# EAGLE board Touch_V5 (EAGLE 6.1)
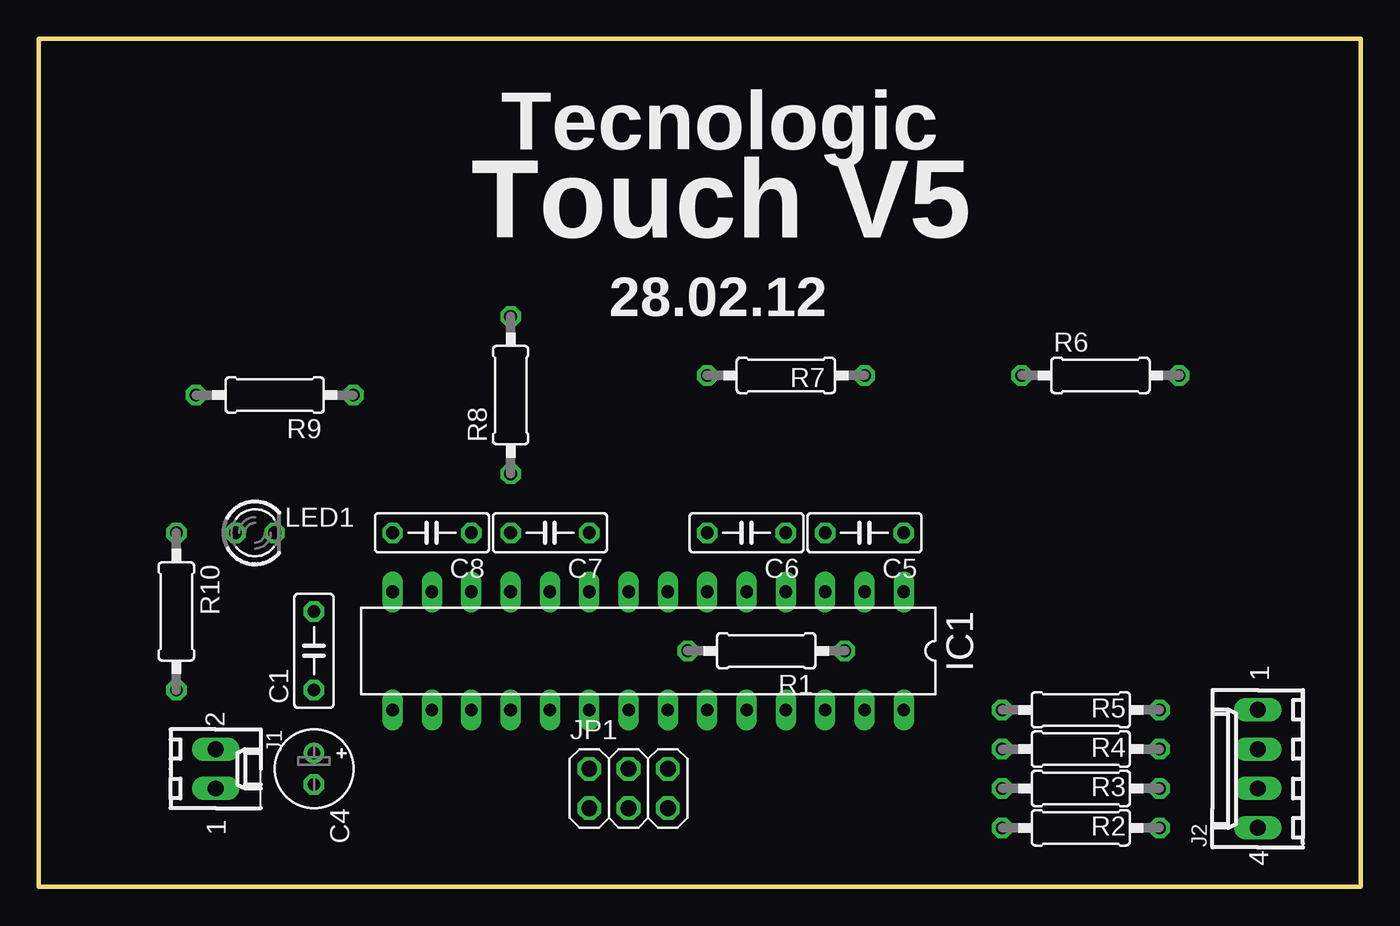
[diagram p0: board, top side]
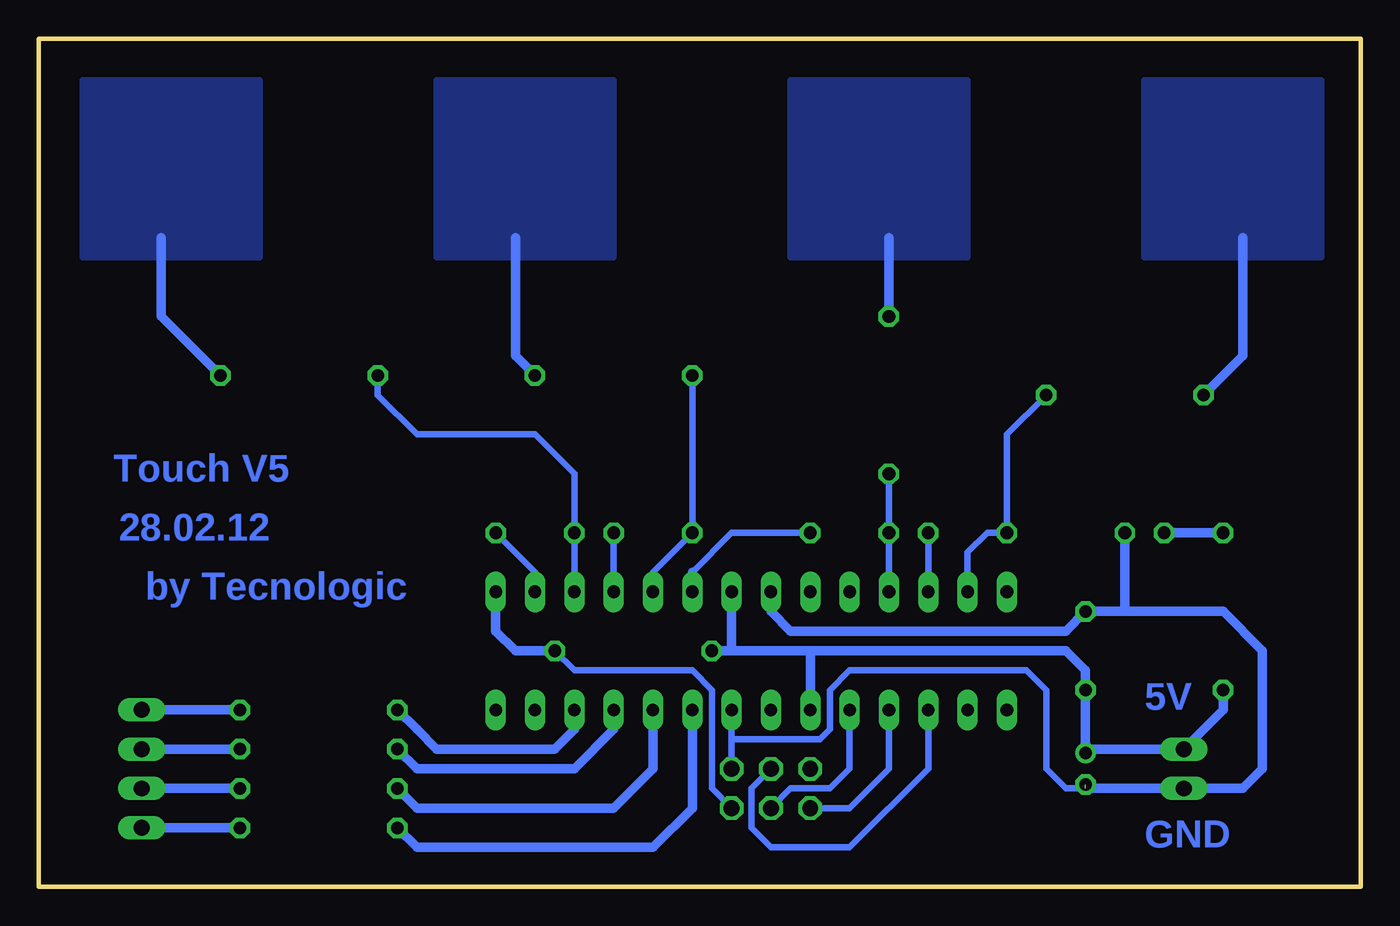
[diagram p1: board, bottom side, seen from below]

Size 85.39 x 54.76 mm. Coordinates in mm from the lower left corner, seen from the top.
Outline: 0,0 85.39,0 85.39,54.76 0,54.76 0,0
Copper layers (1*16): Top 0.035mm / dielectric 1.5mm / Bottom 0.035mm
Design rules: minimum track width 10mil, minimum drill 24mil, track to track 10mil, track to pad 10mil, pad to pad 10mil, via to via 10mil, smd to smd 8mil, copper to edge 40mil, drill to drill 8mil, minimum pad ring 10mil, minimum via ring 8mil, stop-mask expansion 4mil, vias tented up to drill 0mil, thermal gap 10mil

## Footprints (pad centres in the part's own frame; a part is rotated, then mirrored left to right if it is on the bottom)
C050-025X075 = drill 0.813 octagon: 1 -2.54,0; 2 2.54,0
E2-5 = drill 0.813 pad 1.27: + -1.016,0 | drill 0.813 pad 1.27 octagon: - 1.016,0
DIL28-3 = drill 0.813 long: 1 -16.51,-3.81; 2 -13.97,-3.81; 3 -11.43,-3.81; 4 -8.89,-3.81; 5 -6.35,-3.81; 6 -3.81,-3.81; 7 -1.27,-3.81; 8 1.27,-3.81; 9 3.81,-3.81; 10 6.35,-3.81; 11 8.89,-3.81; 12 11.43,-3.81; 13 13.97,-3.81; 14 16.51,-3.81; 15 16.51,3.81; 16 13.97,3.81; 17 11.43,3.81; 18 8.89,3.81; 19 6.35,3.81; 20 3.81,3.81; 21 1.27,3.81; 22 -1.27,3.81; 23 -3.81,3.81; 24 -6.35,3.81; 25 -8.89,3.81; 26 -11.43,3.81; 27 -13.97,3.81; 28 -16.51,3.81
6410-02 = drill 1.016 long: 1 1.27,0; 2 -1.27,0
6410-04 = drill 1.016 long: 1 3.81,0; 2 1.27,0; 3 -1.27,0; 4 -3.81,0
2X03 = drill 1.016 octagon: 1 -2.54,-1.27; 2 -2.54,1.27; 3 0,-1.27; 4 0,1.27; 5 2.54,-1.27; 6 2.54,1.27
LED3MM = drill 0.813 octagon: A -1.27,0; K 1.27,0
0207/10 = drill 0.813 octagon: 1 -5.08,0; 2 5.08,0

## Placement (x,y rotation side)
C1  100n  [C050-025X075]  17.78,15.24 90 top
C4  10µ  [E2-5]  17.78,7.62 270 top
C5  47n  [C050-025X075]  53.34,22.86 180 top
C6  47n  [C050-025X075]  45.72,22.86 180 top
C7  47n  [C050-025X075]  33.02,22.86 180 top
C8  47n  [C050-025X075]  25.4,22.86 180 top
IC1  MEGA48-P  [DIL28-3]  39.37,15.24 180 top
J1  22-27-2021-02  [6410-02]  11.43,7.62 270 top
J2  22-27-2041-04  [6410-04]  78.74,7.62 90 top
JP1  ISP  [2X03]  38.1,6.35 0 top
LED1  PWR  [LED3MM]  13.97,22.86 0 top
R1  10K  [0207/10]  46.99,15.24 180 top
R2  1k  [0207/10]  67.31,3.81 0 top
R3  1k  [0207/10]  67.31,6.35 0 top
R4  1k  [0207/10]  67.31,8.89 0 top
R5  1k  [0207/10]  67.31,11.43 0 top
R6  1k  [0207/10]  68.58,33.02 0 top
R7  1k  [0207/10]  48.26,33.02 0 top
R8  1k  [0207/10]  30.48,31.75 90 top
R9  1k  [0207/10]  15.24,31.75 180 top
R10  1k  [0207/10]  8.89,17.78 270 top

## Library data of the parts
C1 C4-C8 R1-R10 = rcl
IC1 = atmel
J1 J2 = con-molex
JP1 = pinhead
LED1 = led

## Nets
GND: C1.2 C4.- IC1.8 IC1.22 J1.1 JP1.6 LED1.K
KEY0: R6.2
KEY1: R7.2
KEY2: R8.2
KEY3: R9.2
MISO: IC1.18 JP1.1
MOSI: IC1.17 JP1.4
N$2: J2.4 R2.2
N$3: J2.3 R3.2
N$4: J2.2 R4.2
N$5: J2.1 R5.2
N$6: LED1.A R10.1
OUT1: IC1.23 R2.1
OUT2: IC1.24 R3.1
OUT3: IC1.25 R4.1
OUT4: IC1.26 R5.1
RESET: IC1.1 JP1.5 R1.1
SCK: IC1.19 JP1.3
SNS0: C5.1 IC1.2
SNS1: C6.1 IC1.4
SNS2: C7.1 IC1.6
SNS3: C8.1 IC1.12
SNSK0: C5.2 IC1.3 R6.1
SNSK1: C6.2 IC1.5 R7.1
SNSK2: C7.2 IC1.11 R8.1
SNSK3: C8.2 IC1.13 R9.1
VCC: C1.1 C4.+ IC1.7 IC1.20 J1.2 R1.2 R10.2

## Tracks (layer width: path | path; a pad name or v marks a point on that pad's centre or on a via)
GND  (1 unrouted)
  Bottom 0.406: JP1.6 40.64,9.53 | 40.64,9.53 IC1.22 40.64,9.53 | 40.64,9.53 34.92,9.53 34.29,10.16 34.29,12.7 33.02,13.97 21.59,13.97 20.32,12.7 20.32,7.62 19.05,6.35 17.78,6.35
  Bottom 0.61: IC1.8 38.1,17.78 36.83,16.51 21.59,16.51 19.05,16.51 C1.2 15.24,17.78 | 15.24,17.78 10.16,17.78 8.89,17.78 6.35,15.24 6.35,7.62 7.62,6.35 J1.1 17.78,6.35 | LED1.K 15.24,17.78
KEY0
  Bottom 0.61: R6.2 77.47,36.83 77.47,41.91
  pour Bottom (no thermals): 71.12,52.07 82.55,52.07 82.55,40.64 71.12,40.64
KEY1
  Bottom 0.61: R7.2 54.61,34.29 54.61,41.91
  pour Bottom (no thermals): 48.26,52.07 59.69,52.07 59.69,40.64 48.26,40.64
KEY2
  Bottom 0.61: R8.2 30.48,41.91
  pour Bottom (no thermals): 25.4,52.07 36.83,52.07 36.83,40.64 25.4,40.64
KEY3
  Bottom 0.61: R9.2 7.62,34.29 7.62,41.91
  pour Bottom (no thermals): 2.54,52.07 13.97,52.07 13.97,40.64 2.54,40.64
MISO
  Bottom 0.406: JP1.1 33.02,5.08 30.48,7.62 IC1.18
MOSI
  Bottom 0.406: JP1.4 39.37,6.35 39.37,3.81 38.1,2.54 33.02,2.54 27.94,7.62 IC1.17
N$2
  Bottom 0.61: R2.2 J2.4
N$3
  Bottom 0.61: R3.2 J2.3
N$4
  Bottom 0.61: R4.2 J2.2
N$5
  Bottom 0.61: R5.2 J2.1
N$6
  Bottom 0.61: R10.1 LED1.A
OUT1
  Bottom 0.61: IC1.23 43.18,5.08 45.72,2.54 58.42,2.54 60.96,2.54 R2.1
OUT2
  Bottom 0.61: IC1.24 45.72,7.62 48.26,5.08 59.69,5.08 60.96,5.08 R3.1
OUT3
  Bottom 0.61: IC1.25 48.26,10.16 50.8,7.62 58.42,7.62 60.96,7.62 R4.1
OUT4
  Bottom 0.61: IC1.26 50.8,10.16 52.07,8.89 59.69,8.89 60.96,10.16 R5.1
RESET
  Bottom 0.406: JP1.5 41.91,6.35 41.91,12.7 43.18,13.97 50.8,13.97 R1.1
  Bottom 0.61: IC1.1 55.88,16.51 54.61,15.24 R1.1
SCK
  Bottom 0.406: JP1.3 36.83,6.35 34.29,6.35 33.02,7.62 IC1.19
SNS0
  Bottom 0.406: IC1.2 53.34,20.32 C5.1
SNS1
  Bottom 0.406: IC1.4 C6.1
SNS2
  Bottom 0.406: C7.1 40.64,22.86 43.18,20.32
  Bottom 0.61: 43.18,20.32 IC1.6
SNS3
  Bottom 0.406: IC1.12 C8.1
SNSK0
  Bottom 0.406: IC1.3 C5.2 50.8,26.67 53.34,29.21 60.96,29.21 63.5,31.75 R6.1
SNSK1
  Bottom 0.406: IC1.5 45.72,20.32 C6.2 43.18,29.21 R7.1
SNSK2
  Bottom 0.406: IC1.11 C7.2 R8.1
SNSK3
  Bottom 0.406: IC1.13 25.4,21.59 24.13,22.86 C8.2 22.86,29.21 R9.1
VCC
  Bottom 0.61: R1.2 40.64,15.24 | 40.64,15.24 35.56,15.24 | 35.56,15.24 21.59,15.24 19.05,15.24 17.78,13.97 C1.1 17.78,8.89 | IC1.7 40.64,15.24 | IC1.20 35.56,15.24 | 17.78,8.89 C4.+ | 17.78,8.89 J1.2 8.89,11.43 R10.2

## Text on the board
Bottom: Touch V5 | 28.02.12 | by Tecnologic | 5V | GND
tNames: Tecnologic | Touch V5 | 28.02.12
bRestrict: -> | <- | <- | ->